# Altium PCB LPC55S69_MINI [C].PCBdoc (part 2 of 3)
Units mil, origin at the board's own origin, x right, y up, seen from the top; angles counter-clockwise.
Board outline 1610.03 x 1685.03 mil, 4 copper layers (Top Layer, PWR, GND, Bottom Layer), stack 39.556 mil thick; 73 components, 63 nets, 296 pads, 147 vias.
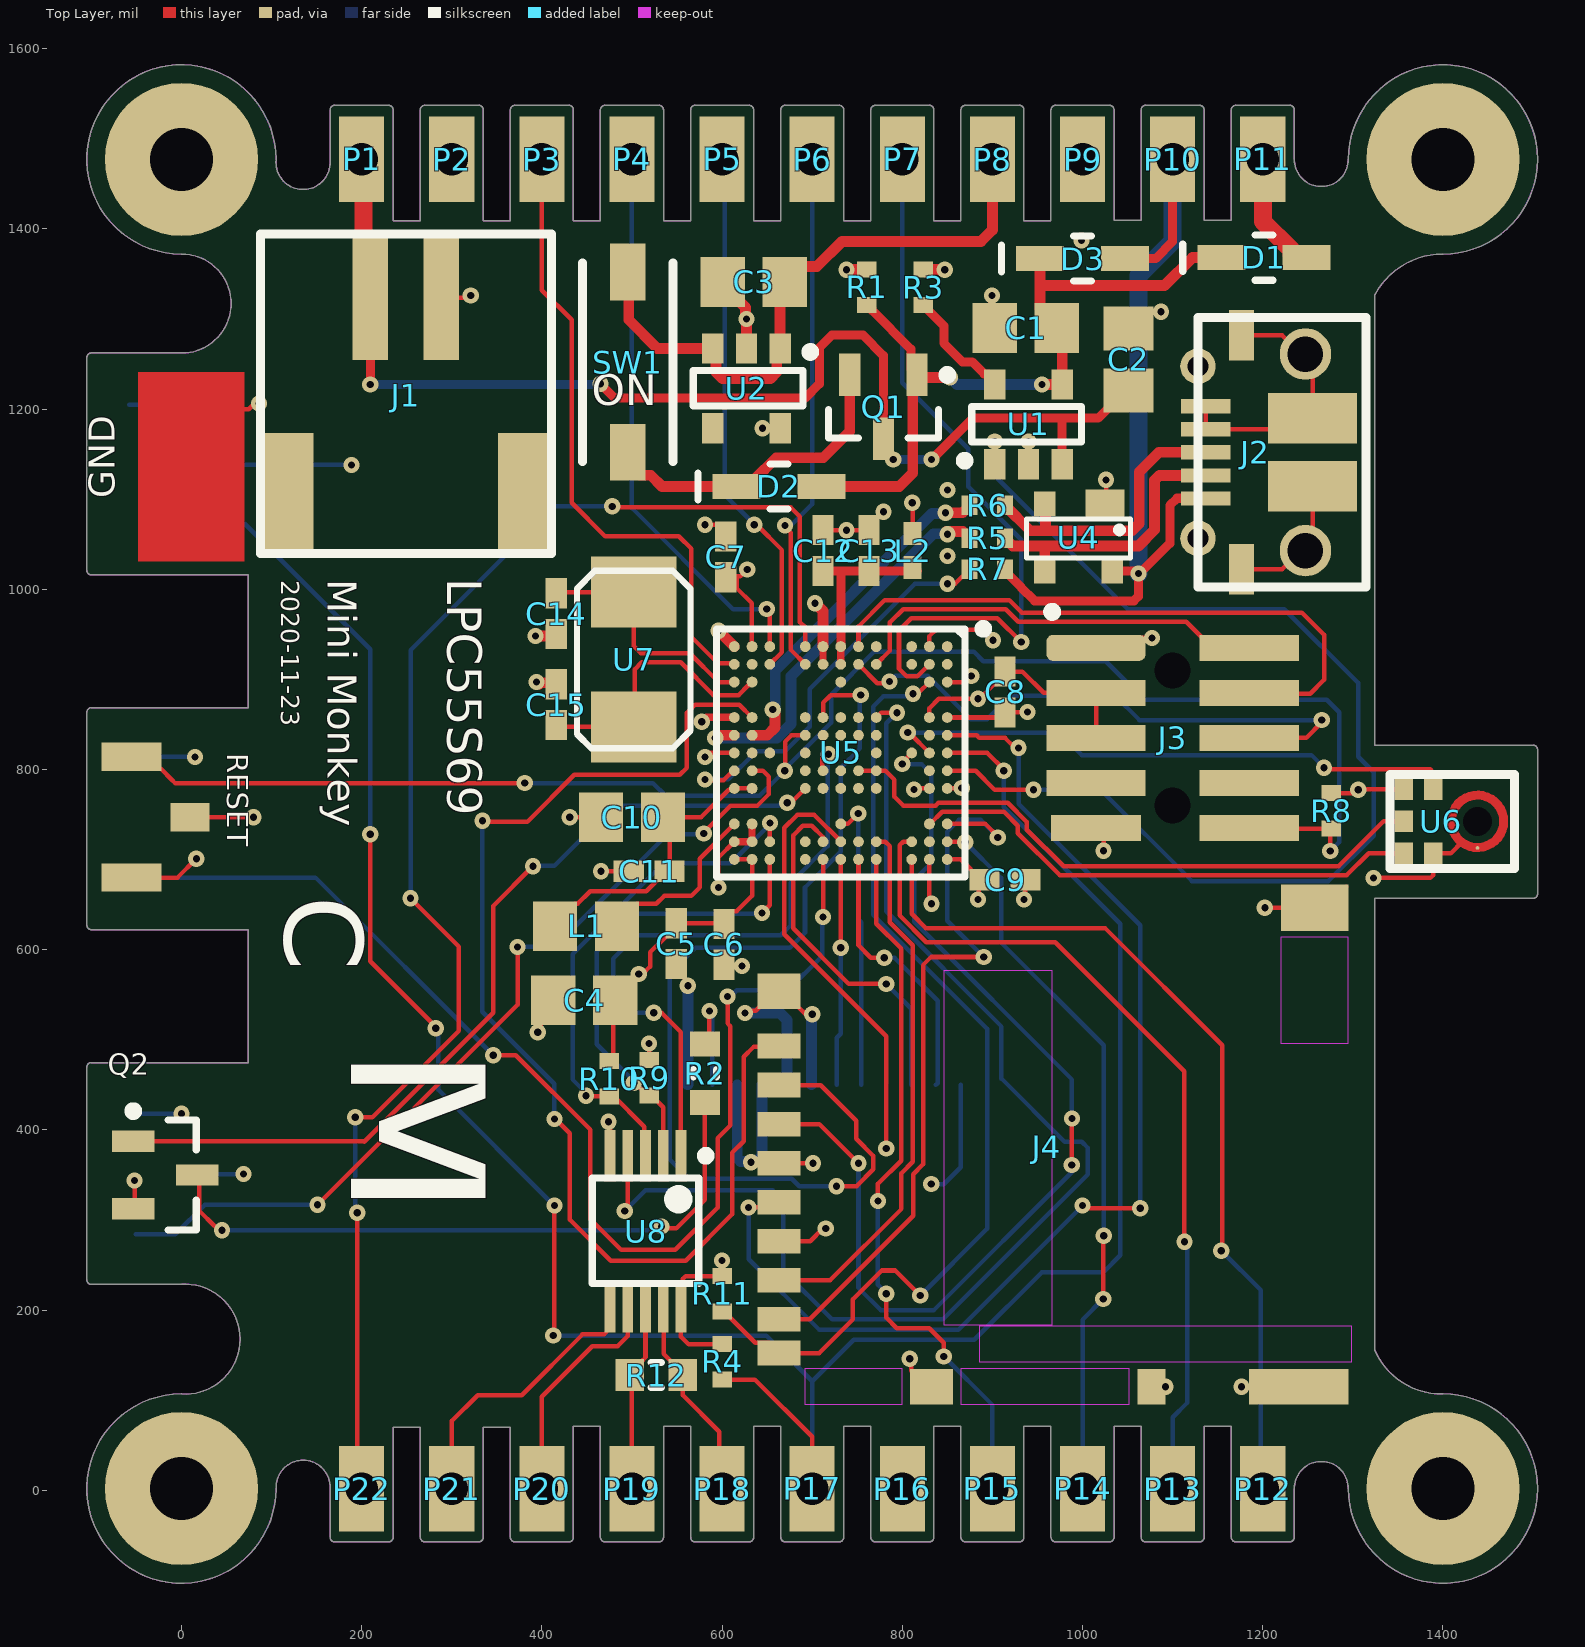
[diagram p0: Top Layer view]

## Via types
v1: diameter 18, hole 8, Top Layer to Bottom Layer, tented both sides, 147 vias

## Nets (pads, with @x,y where several pads share a name; then routed paths per layer and width w, separated by ;. In a path a pad name is that pad's centre, name@x,y a point inside that pad or via, vN(x,y) a via of type N, cw(c..) or ccw(c..) an arc to the next point about the centre after c; other vN are vias at no path point) (continued)
+VIN: (continued)
  Top Layer w20: P11.1@1200,1477 1200,1408.32 1231.91,1376.41 1231.91,1371.78 1235.69,1368 D1.1@1248.49,1368
BATT: C2.2 J1.2 P1.1 Q1.3 U1.3 | length 1369.1
  Top Layer w5: J1.2@200,1332.9 J1.2@209.63,1323.27
  Top Layer w10: v1(209.63,1227.29) J1.2@209.63,1323.27 ; v1(465,1228) 481,1212 692,1212 708,1228 708,1268 721.92,1281.92 756.43,1281.92 779,1259.35 Q1.3@779,1167 785.81,1160.19 785.81,1148.19 v1(790,1144) ; v1(832.4,1144) 878.3,1189.89 977.4,1189.89 ; U1.3@977.4,1138.71 977.4,1189.89 ; C2.2@1051,1220.55 1048.05,1220.55 1017.39,1189.89 977.4,1189.89
  Top Layer w20: P1.1@200,1477 202,1475 202,1330.9 J1.2@209.63,1323.27
  Bottom Layer w10: v1(209.63,1227.29) 459.15,1227.29 459.86,1228 v1(465,1228) ; v1(790,1144) v1(832.4,1144)
BATT_STAT: U1.1 U5.A8 | length 1289.7
  Top Layer w5: U5.A8@849.8,798.63 881.34,798.63 902.37,777.61 v1(945.5,777.61) ; U1.1@902.6,1138.71 v1(902.6,1164.08) v1@907,1168.48
  Bottom Layer w5: v1(902.6,1164.08) 902.6,1125.9 1050.5,978 1224,978 1306,896 1306,814 1323,797 1323,726.56 1272.59,676.15 1121.45,676.15 1019.99,777.61 v1(945.5,777.61)
BTN2: BTN2.2 U5.H13 | length 1363.7
  Top Layer w5: v1(346,482.85) 371.15,482.85 453.91,400.09 453.91,300.92 487.84,267 548.17,267 595,313.83 595,391 608.97,404.97 608.97,515.19 606,518.16 606,524.78 v1(606,548) ; v1(712,636.35) U5.H13@712,700.2
  Bottom Layer w5: BTN2.2@-37,680.07 148.77,680.07 v1(346,482.85) ; v1(606,548) 606,544.86 v1@605.18,544.04 ; v1@609.04,544.04 v1@605.18,544.04 ; v1(712,636.35) 711,635.35 711,593 673,555 616.14,555 v1@605.18,544.04
BTN3: BTN3.2 U5.M8 | length 984.3
  Top Layer w5: v1(151,317) 373,539 v1(373,603.13) ; v1(579.74,729.07) 579.74,730.12 609.59,759.97 639.22,759.97 652,772.76 652,792 645.37,798.63 U5.M8@633.26,798.63
  Bottom Layer w5: BTN3.2@-50.93,284.07 -6.86,284.07 26.07,317 v1(151,317) ; v1(373,603.13) 414.34,603.13 539.34,728.13 578.79,728.13 v1(579.74,729.07)
DE: R10.2 U5.L12 U8.3 | length 572.8
  Top Layer w5: v1(449,438) 449.69,437.31 R10.2@475,437.31 ; R10.2@479,438.31 513.77,403.54 513.77,372.55 U8.3@515,371.32 ; U5.L12@652.94,719.89 653.11,720.06 653.11,740.56 v1(653.28,740.73)
  Bottom Layer w5: v1(449,438) 449,441 434,456 434,595 534.93,695.93 609.76,695.93 653.28,739.45 v1(653.28,740.73)
DM: J2.2 R5.1 U4.3 | length 317.8
  Top Layer w12: R5.1@914,1056.53 922.53,1048 958,1048 1062,1048 1080,1066 1080,1120.96 1085.45,1126.41 J2.2@1136.57,1126.41 ; U4.3@958,1020 958,1047
DM_MCU: R5.2 U5.N6 | length 453.9
  Top Layer w12: v1@593.24,835 v1(592.46,835) 595.46,838 U5.N6@613.57,838 ; v1(850,1061) 850,1058.29 852.35,1060.65 849,1064 867.16,1064 R5.2@874.63,1056.53
  Bottom Layer w12: v1(592.46,835) 661,835 676.44,850.44 676.44,903.4 834.69,1061.65 851.35,1061.65 852.35,1060.65 850,1058.29 v1(850,1061)
DP: J2.3 R6.1 U4.2 | length 333.8
  Top Layer w12: R6.1@914,1093 942,1065 959,1065 ; U4.2@958,1094.8 959,1093.8 959,1065 ; J2.3@1136.57,1152 1085,1152 1063,1130 1063,1073.04 1054.96,1065 959,1065
DP_MCU: R6.2 U5.M6 | length 391.3
  Top Layer w12: U5.M6@633.26,838 650,838 658.68,846.68 658.68,863.93 v1(656.21,866.4) ; v1(848,1085) 866.63,1085 R6.2@874.63,1093
  Bottom Layer w12: v1(656.21,866.4) 659,869.2 659,910 833,1084 v1@848,1084 ; v1@848,1082 v1@848,1084 ; v1(848,1085) v1@848,1084 ; v1@850.74,1084 v1@848,1084
FC1_SCL: P12.1 U5.C13 | length 976.9
  Top Layer w5: U5.C13@810.43,700.2 810.43,639.74 826.17,624 1025,624 1155,494 1155,267 v1(1154,266)
  Bottom Layer w5: v1(1154,266) 1198,222 1198,4 P12.1@1200,2
FC1_SDA: P13.1 U5.C12 | length 970
  Top Layer w5: U5.C12@810.43,719.89 800.89,719.89 796.93,715.93 796.93,638.07 826.59,608.41 969.59,608.41 1113,465 v1(1113,276)
  Bottom Layer w5: P13.1@1113,15 P13.1@1100,2 1100,81 1116,97 1116,141 1116,273 v1(1113,276)